# EAGLE board pdb (EAGLE 8.7.0)
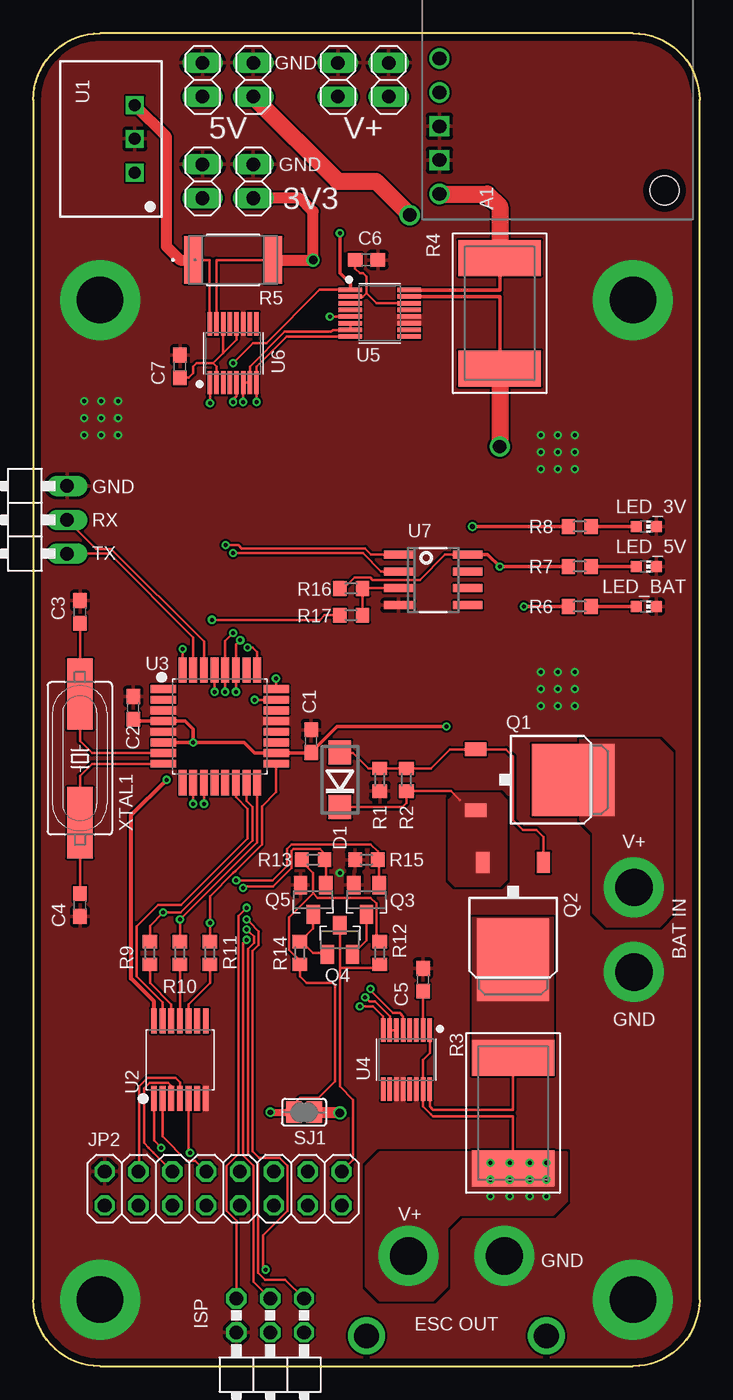
[diagram p0: board, top side]
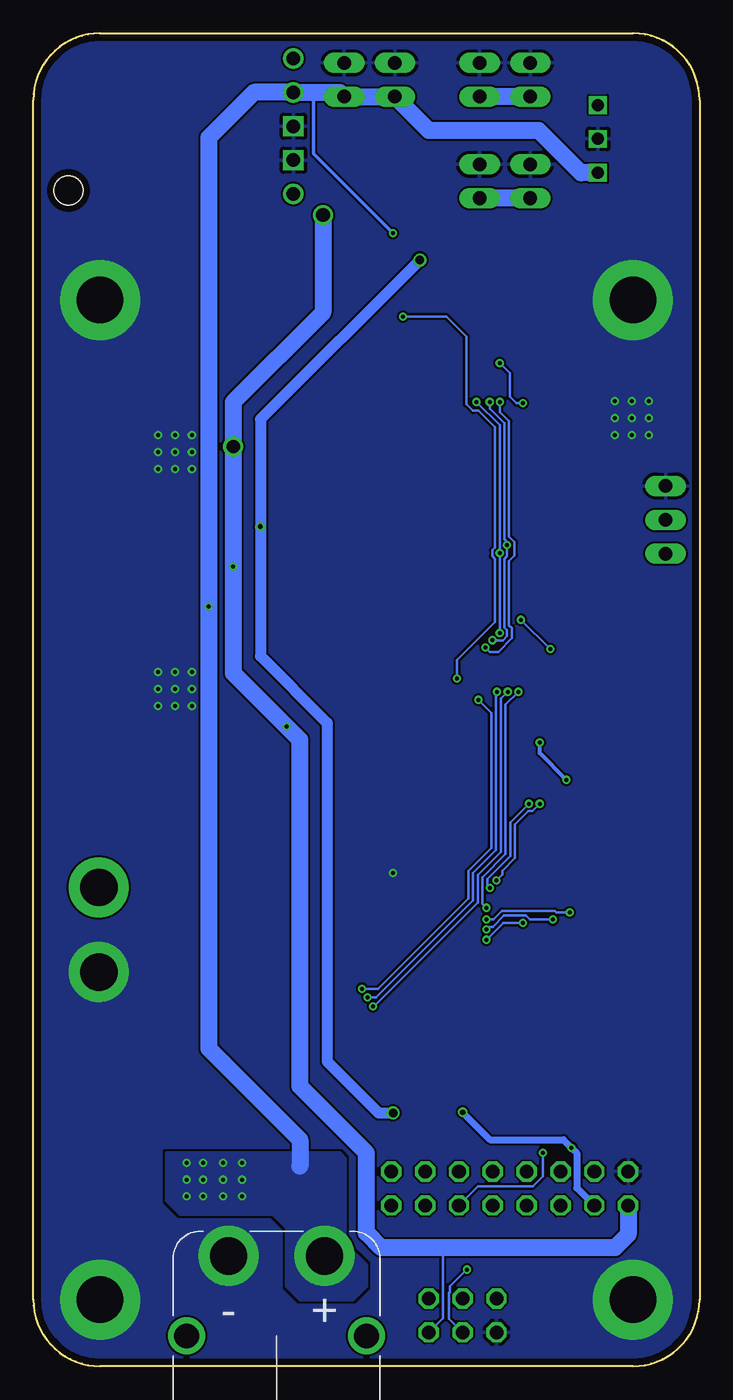
[diagram p1: board, bottom side, seen from below]

Size 50 x 100 mm. Coordinates in mm from the lower left corner, seen from the top.
Outline: 5,0 arc-90 0,5 0,95 arc-90 5,100 45,100 arc-90 50,95 50,5 arc-90 45,0 5,0
Copper layers (1*16): Top 0.035mm / dielectric 1.5mm / Bottom 0.035mm
Design rules "FusionPCB": minimum track width 7mil, minimum drill 0.3mm, track to track 6mil, track to pad 6mil, pad to pad 6mil, via to via 6mil, smd to smd 6mil, copper to edge 20mil, drill to drill 12mil, minimum pad ring 6mil, minimum via ring 6mil, stop-mask expansion 4mil, vias tented up to drill 0.9mm, thermal gap 10mil
Net classes: 1 V+: width 1.27 mm, clearance 0.216 mm; 2 GND: width 0.254 mm; 3 SIGNAL: width 0.203 mm; 4 POWER: width 0.305 mm

## Footprints (pad centres in the part's own frame; a part is rotated, then mirrored left to right if it is on the bottom)
D24V50F5_SINGLESCREW = drill 1.016: 1 -12.065,1.27; 2 -9.525,1.27; 5 -1.905,1.27 | drill 1.016 square: 3 -6.985,1.27; 4 -4.445,1.27 | hole 2.184: -2.159,18.161
C0603 = smd 1.1 x 1: 1 -0.85,0; 2 0.85,0
DO214BA = smd 1.8 x 1.7: A 2.05,0; C -2.05,0
2X03/90 = drill 1.016 octagon: 1 -2.54,-6.35; 2 -2.54,-3.81; 3 0,-6.35; 4 0,-3.81; 5 2.54,-6.35; 6 2.54,-3.81
XT60PWFEMALE = drill 1.85: NC1 -6.75,0; NC2 6.75,0 | drill 2.8 pad 4.5: NEG 3.6,-6; POS -3.6,-6
1X02 = drill 1.016 long: 1 -1.27,0; 2 1.27,0
2X08 = drill 1.016 octagon: 1 -8.89,-1.27; 2 -8.89,1.27; 3 -6.35,-1.27; 4 -6.35,1.27; 5 -3.81,-1.27; 6 -3.81,1.27; 7 -1.27,-1.27; 8 -1.27,1.27; 9 1.27,-1.27; 10 1.27,1.27; 11 3.81,-1.27; 12 3.81,1.27; 13 6.35,-1.27; 14 6.35,1.27; 15 8.89,-1.27; 16 8.89,1.27
1X03/90 = drill 1.016 long: 1 -2.54,-3.81; 2 0,-3.81; 3 2.54,-3.81
CHIP-LED0603 = smd 0.8 x 0.8: A 0,-0.75; C 0,0.75
D-PAK_TO252AA = smd 1 x 1.6: 1 -2.28,-4.8; 3 2.28,-4.8 | smd 5.4 x 6.2: 4 0,2.5
BSN20_215 = smd 1 x 1.4: 1 -0.95,-1.1; 2 0.95,-1.1; 3 0,1.1
R0603 = smd 1 x 1.1: 1 -0.85,0; 2 0.85,0
3920 = smd 2.7 x 6.2: P$1 -4.15,0; P$2 4.15,0
BO_CRA2512 = smd 1.397 x 3.531: 1 -2.985,0; 2 2.985,0
SJ = smd 1.168 x 1.6: 1 -0.762,0; 2 0.762,0
TSR-1 = drill 0.9 square: 1 -2.54,0; 2 0,0; 3 2.54,0
SOP65P640X120-14 = smd 1.872 x 0.447: 1 -2.922,1.95; 2 -2.922,1.3; 3 -2.922,0.65; 4 -2.922,0; 5 -2.922,-0.65; 6 -2.922,-1.3; 7 -2.922,-1.95; 8 2.922,-1.95; 9 2.922,-1.3; 10 2.922,-0.65; 11 2.922,0; 12 2.922,0.65; 13 2.922,1.3; 14 2.922,1.95
QFP80P900X900X120-32 = smd 1.9 x 0.587: 1 -4.231,2.8; 2 -4.231,2; 3 -4.231,1.2; 4 -4.231,0.4; 5 -4.231,-0.4; 6 -4.231,-1.2; 7 -4.231,-2; 8 -4.231,-2.8; 17 4.231,-2.8; 18 4.231,-2; 19 4.231,-1.2; 20 4.231,-0.4; 21 4.231,0.4; 22 4.231,1.2; 23 4.231,2; 24 4.231,2.8 | smd 0.587 x 1.9: 9 -2.8,-4.231; 10 -2,-4.231; 11 -1.2,-4.231; 12 -0.4,-4.231; 13 0.4,-4.231; 14 1.2,-4.231; 15 2,-4.231; 16 2.8,-4.231; 25 2.8,4.231; 26 2,4.231; 27 1.2,4.231; 28 0.4,4.231; 29 -0.4,4.231; 30 -1.2,4.231; 31 -2,4.231; 32 -2.8,4.231
SOP50P489X110-16 = smd 1.753 x 0.344: 1 -2.209,1.75; 2 -2.209,1.25; 3 -2.209,0.75; 4 -2.209,0.25; 5 -2.209,-0.25; 6 -2.209,-0.75; 7 -2.209,-1.25; 8 -2.209,-1.75; 9 2.209,-1.75; 10 2.209,-1.25; 11 2.209,-0.75; 12 2.209,-0.25; 13 2.209,0.25; 14 2.209,0.75; 15 2.209,1.25; 16 2.209,1.75
SO08 = smd 0.6 x 2.2: 1 -1.905,-2.6; 2 -0.635,-2.6; 3 0.635,-2.6; 4 1.905,-2.6; 5 1.905,2.6; 6 0.635,2.6; 7 -0.635,2.6; 8 -1.905,2.6
HC49UP = smd 5.334 x 1.93: 1 -4.826,0; 2 4.826,0

## Placement (x,y rotation side)
A1  D24V50F5SINGLESCREW  [D24V50F5_SINGLESCREW]  29.21,86.04 270 top
C1  100nF  [C0603]  20.85,46.9 90 top
C2  100nF  [C0603]  7.5,49.4 90 top
C3  22pF  [C0603]  3.5,56.6 90 top
C4  22pF  [C0603]  3.5,34.6 270 top
C5  0,1µF  [C0603]  29.25,29 90 top
C6  0,1µF  [C0603]  25,83 0 top
C7  0,1µF  [C0603]  11,75 90 top
D1  ZD18  [DO214BA]  23,44 90 top
ISP  [2X03/90]  17.78,-1.27 180 top
J1  XT60PWFEMALE  [XT60PWFEMALE]  31.75,2.27 180 bottom
JP1  [1X02]  26.67,96.52 90 top
JP2  [2X08]  14.24,13.34 0 top
JP3  [1X02]  22.86,96.52 90 top
JP4  [1X02]  16.51,96.52 90 top
JP5  [1X02]  12.7,96.52 90 top
JP6  [1X02]  12.7,88.9 90 top
JP7  [1X02]  16.51,88.9 90 top
JP8  [1X03/90]  -1.27,63.5 90 top
LED_3V  orange  [CHIP-LED0603]  46,63 270 top
LED_5V  grün  [CHIP-LED0603]  46,60 270 top
LED_BAT  blau  [CHIP-LED0603]  46,57 270 top
Q1  IRFR5305PBF  [D-PAK_TO252AA]  38,44 270 top
Q2  IRFR5305PBF  [D-PAK_TO252AA]  36,33 180 top
Q3  BSN20,215  [BSN20_215]  25,35 180 top
Q4  BSN20,215  [BSN20_215]  21,35 180 top
Q5  BSN20,215  [BSN20_215]  23,32 0 top
R1  1k  [R0603]  26,44 90 top
R2  10k  [R0603]  28,44 270 top
R3  2m  [3920]  36,19 270 top
R4  2m  [3920]  35,79 270 top
R5  CRA2512-FZ-R040ELF  [BO_CRA2512]  15,83 0 top
R6  1,2k  [R0603]  41,57 180 top
R7  250  [R0603]  41,60 180 top
R8  100  [R0603]  41,63 180 top
R9  10k  [R0603]  8.75,31 270 top
R10  10k  [R0603]  11,31 270 top
R11  10k  [R0603]  13.25,31 270 top
R12  10k  [R0603]  26,31 90 top
R13  10k  [R0603]  21,38 180 top
R14  10k  [R0603]  20,31 270 top
R15  10k  [R0603]  25,38 0 top
R16  10k  [R0603]  23.85,58.35 180 top
R17  10k  [R0603]  23.85,56.35 0 top
SJ1  [SJ]  20.32,19.05 180 top
U1  TSR_1-2433  [TSR-1]  7.62,92.08 90 top
U2  TXB0104  [SOP65P640X120-14]  11,23 90 top
U3  ATMEGA48-20AU  [QFP80P900X900X120-32]  14,48 0 top
U4  LTC2946CMSPBF  [SOP50P489X110-16]  28,23 270 top
U5  LTC2946CMSPBF  [SOP50P489X110-16]  26,79 0 top
U6  LTC2946CMSPBF  [SOP50P489X110-16]  15,76 90 top
U7  AT30TS74SS8M  [SO08]  30,59 270 top
XTAL1  20MHz  [HC49UP]  3.5,45.6 90 top

## Library data of the parts
A1 = jonas_pololu
C1-C7 = rcl; SPICEPREFIX: C
D1 = diode
ISP JP1-JP8 = pinhead
J1 = amass
LED_3V LED_5V LED_BAT = led
Q1 Q2 = transistor-power
Q3-Q5 = jonas_mosfet; AVAILABILITY: Good; DESCRIPTION: BSN Series 50 V 15 Ohm 0.83 W N-Channel Enhancement Mode Transistor - SOT-23; MF: NXP Semiconductors; MP: BSN20,215; PACKAGE: TO-236 NXP Semiconductors; PRICE: 0.17 USD
R1 R2 R6-R17 = rcl; SPICEPREFIX: R
R3 R4 = jonas_resistor
R5 = jonas_bourns; MANUFACTURER_PART_NUMBER: CRA2512FZR040ELF; VENDOR: Bourns Electronics
SJ1 = jumper
U1 = Robo-Lib
U2 = jonas_ti
U3 = jonas_atmel
U4 = linear; SPICEPREFIX: X
U5 U6 = linear
U7 = jonas_microchip
XTAL1 = crystal; OC_FARNELL: unknown; OC_NEWARK: unknown

## Nets
!ALERT_3V3 [SIGNAL]: U3.25 U6.5
!ALERT_5V [SIGNAL]: U3.24 U5.5
!ALERT_V+ [SIGNAL]: U3.23 U4.5
!TMP_ALERT: R17.1 U3.32
+3V3: JP6.1 JP7.1 R5.2 R8.2 SJ1.1 U6.15
+5V: C1.1 C2.1 ISP.2 JP2.1 JP4.1 JP5.1 R4.P$2 R7.2 R16.2 U2.14 U3.4 U3.6 U3.18 U5.15 U7.8
AKKU-ZWISCHEN: D1.C Q1.3 Q2.3 R2.2
BAT_IN: Q1.4
EXT_3V3: JP2.3 R12.2 R13.2 R14.2 SJ1.2 U2.1
EXT_!RST [SIGNAL]: JP2.16 Q5.3 R12.1
EXT_A0 [SIGNAL]: JP2.9
EXT_A3 [SIGNAL]: JP2.7
EXT_A4 [SIGNAL]: JP2.5
EXT_D1 [SIGNAL]: JP2.14
EXT_D2 [SIGNAL]: JP2.12
EXT_D9 [SIGNAL]: JP2.10
EXT_SCL_5V [SIGNAL]: JP2.13
EXT_SDA_5V [SIGNAL]: JP2.15
EXT_SPI_CLK [SIGNAL]: JP2.11 U2.5
EXT_SPI_CS [SIGNAL]: JP2.8 U2.2
EXT_SPI_MISO [SIGNAL]: JP2.4 U2.4
EXT_SPI_MOSI [SIGNAL]: JP2.6 U2.3
GND: A1.3 A1.4 C1.2 C2.2 C3.2 C4.2 C5.2 C6.2 C7.2 ISP.6 J1.NEG JP1.2 JP2.2 JP3.2 JP4.2 JP5.2 JP6.2 JP7.2 JP8.3 LED_3V.C LED_5V.C LED_BAT.C Q3.2 Q4.2 R1.1 R15.1 U1.2 U2.7 U3.3 U3.5 U3.21 U4.11 U4.12 U4.14 U5.11 U5.12 U6.11 U7.4
GPIO1_3V3 [SIGNAL]: U6.3
GPIO1_5V [SIGNAL]: U5.3
GPIO1_V+ [SIGNAL]: U4.3
GPIO2_3V3 [SIGNAL]: U6.4
GPIO2_5V [SIGNAL]: U5.4
GPIO2_V+ [SIGNAL]: U4.4
INTVCC_3V3: C7.1 U6.2 U6.12 U6.14
INTVCC_5V: C6.1 U5.2 U5.14
INTVCC_V+: C5.1 U4.2
MISO_5V [SIGNAL]: ISP.1 R10.1 U3.16
MOSI_5V [SIGNAL]: ISP.4 R9.1 U3.15
N$1: R10.2 U2.11
N$2: R9.2 U2.12
N$3: R11.2 U2.10
N$4: LED_BAT.A R6.1
N$5: LED_5V.A R7.1
N$6: R16.1 R17.2 U7.3
N$7: LED_3V.A R8.1
N$9: Q4.3 Q5.1 R14.1
N$11: Q3.3 Q5.2
N$27: C3.1 U3.7 XTAL1.2
N$28: C4.1 U3.8 XTAL1.1
N$41: D1.A Q1.1 Q2.1 R1.2 R2.1
RESET: ISP.5 U3.29
RST_H: Q3.1 R15.2 U3.10
RST_L: Q4.1 R13.1 U3.11
RX: JP8.2 U3.30
SCK_5V [SIGNAL]: ISP.3 R11.1 U3.17
SCL [SIGNAL]: U3.28 U4.8 U5.8 U6.8 U7.2
SDA [SIGNAL]: U3.27 U4.6 U4.7 U5.6 U5.7 U6.6 U6.7 U7.1
SENSE+3V3 [SIGNAL]: R5.1 U1.3 U6.16
SENSE+5V [SIGNAL]: A1.5 R4.P$1 U5.16
SENSE+V+: Q2.4 R3.P$1 U4.16
SS_5V [SIGNAL]: U2.13 U3.14
TX: JP8.1 U3.31
V+: A1.2 J1.POS JP1.1 JP3.1 R3.P$2 R6.2 U1.1 U4.1 U4.15 U5.1 U6.1

## Tracks (layer width: path | path; a pad name or v marks a point on that pad's centre or on a via)
!ALERT_3V3  (via drill 0.3)
  Top 0.203: 15.25,73.81 U6.5 15.25,72.8 14.99,72.54 v14.99,72.35 | v16.07,53.93 16.47,53.93 16.8,53.6 U3.25
  Bottom 0.203: v16.07,53.93 15.74,53.6 15.11,53.6 14.09,54.62 14.09,55.38 14.29,55.58 14.29,60.42 13.89,60.82 13.89,61.83 14.29,62.23 14.29,70.89 14.99,71.6 v14.99,72.35
!ALERT_5V  (via drill 0.3)
  Top 0.203: v22.25,78.75 U5.5 23.82,78.75 | v18.2,51.6 18.2,50.83 U3.24
  Bottom 0.203: v22.25,78.75 19,78.75 17.5,77.25 17.5,72.18 17,71.68 16.58,71.68 15.36,70.45 15.36,70 15.36,69.65 15.36,61.43 15.56,61.23 15.56,60.77 15.36,60.57 15.36,55.84 18.2,53 v18.2,51.6
!ALERT_V+  (via drill 0.3)
  Top 0.203: v25.32,28.32 25.32,28.18 27.01,26.5 27.5,26.5 27.75,26.25 U4.5 | v16.6,50 U3.23
  Bottom 0.203: v25.32,28.32 24.11,28.32 17.36,35.08 17.36,37.15 15.62,38.88 15.62,49.02 v16.6,50
!TMP_ALERT  (via drill 0.3)
  Top 0.203: U3.32 v11.2,53.8 | v13.4,56 21.5,56 21.85,56.35 R17.1
  Bottom 0.203: v11.2,53.8 v13.4,56
+3V3  (via drill 0.35, 0.65)
  Top 0.203: U6.15 13.75,83 R5.2
  Top 0.254: R8.2 v32.96,63 v32.95,62.99
  Top 0.813: R5.2 v21,83 21,86.63 20,87.63 JP7.1 | v23,19 21.13,19 SJ1.1
  Bottom 0.813: v21,83 32.95,71.05 v32.95,62.99 32.95,53.27 27.94,48.26 27.94,22.86 24.08,19 v23,19
  Bottom 1.27: JP6.1 JP7.1
+5V  (via drill 0.3, 1, 1.02)
  Top 0.203: R16.2 23.29,58.35 24.09,59.15 25.3,59.15 25.46,59 29,59 30.91,60.91 U7.8
  Top 0.254: U7.8 34.09,60.91 v35,60 38.1,60 R7.2 | U5.15 35,80.25 R4.P$2 | U3.6 v12,46.8 | v12,46.8 15.8,46.8 16.6,46 U3.18 20.8,46 C1.1 22.8,48 v31,48 | v12,46.8 12,47.8 11.4,48.4 U3.4 7.65,48.4 C2.1
  Top 0.305: U2.14 9.05,27.37 7.34,29.08 7.34,41.34 v10,44
  Top 1.27: R4.P$2 v35,69 | JP4.1 22.86,88.9 25.72,88.9 v28.26,86.36
  Bottom 0.203: ISP.2 19.25,3.61 19.25,8.89
  Bottom 0.305: v10,44 12,46 v12,46.8
  Bottom 1.27: JP2.1 5.36,9.88 6.35,8.89 19.25,8.89 23.89,8.89 25,10 25,16 30,21 30,47 v31,48 35,52 v35,60 v35,69 35,72.31 28.26,79.06 v28.26,86.36 | JP5.1 JP4.1
AKKU-ZWISCHEN
  Top 0.203: 32,42.5 31.35,43.15 R2.2 28,42.25 27.7,41.95 D1.C
  pour Top (no thermals): 35,43 35.5,42.5 35.5,36.5 35,36 31.68,36 31.18,36.5 31.18,42.5 31.68,43
BAT_IN  (via drill 2.8 pad 4.5)
  other vias: 45.09,35.92
  pour Top (no thermals): 41,47 41,41 42,40 42,34 43,33 47,33 48,34 48,46 47,47
EXT_3V3  (via drill 0.3, 0.4)
  Top 0.203: U2.1 9.05,16.95 v9.6,16.4 | R13.2 20.15,37.85 21,37 21,35.46 | 21,35.46 19.2,33.66 19.2,31.25 20,30.44 R14.2 20,29.25 20.5,28.75 22.5,28.75 22.64,28.61 22.64,21.38 21.39,20.12 20,20.12 19.56,19.68 SJ1.2 | 21,35.46 21.03,35.46 21.34,35.15 25.31,35.15 25.75,34.7 25.75,32.1 R12.2
  Top 0.508: v17.78,19.05 SJ1.2
  Bottom 0.508: JP2.3 9.21,13.38 9.21,16 v9.6,16.4 10.21,17 15.73,17 v17.78,19.05
EXT_!RST
  Top 0.203: 25.7,29.84 R12.1 25.73,29.88 23,29.88 | JP2.16 24,15.47 24,20 23,21 23,29.88 | Q5.3 23,29.88
EXT_SPI_CLK  (via drill 0.3)
  Top 0.203: U2.5 11.65,16.1 v11.75,16
  Bottom 0.203: JP2.11 16.62,13.5 12.5,13.5 11.75,14.25 v11.75,16
EXT_SPI_CS
  Top 0.203: JP2.8 12.16,15.42 11.51,15.42 9.7,17.23 U2.2
EXT_SPI_MISO
  Top 0.203: JP2.4 7.94,14.65 7.94,20.99 8.57,21.62 10.68,21.62 11,21.3 U2.4
EXT_SPI_MOSI
  Top 0.203: 10.35,14.69 JP2.6 9.02,16.02 8.64,16.4 8.3,16.74 8.3,20.85 8.72,21.27 10.13,21.27 10.35,21.05 U2.3
GND  (via drill 0.3, 2.8 pad 4.5, 3.5 pad 6)
  other vias: 5,80 45,80 5,5 45,5 45.09,29.57 6.35,72.39 5.08,72.39 3.81,72.39 6.35,71.12 5.08,71.12 3.81,71.12 6.35,69.85 5.08,69.85 3.81,69.85 39.37,68.58 39.37,69.85 39.37,67.31 38.1,68.58 40.64,68.58 38.1,67.31 40.64,67.31 38.1,69.85 40.64,69.85 38.1,52.07 40.64,50.8 40.64,52.07 39.37,52.07 39.37,50.8 38.1,50.8 38.1,49.53 39.37,49.53 40.64,49.53 23,37
  pour Top (rank 6): 0,100 50.8,100 50.8,-2.54 0,-2.54
  pour Bottom (rank 6): 0,100 50.8,100 50.8,-2.54 0,-2.54
INTVCC_3V3
  Top 0.203: C7.1 11.65,74.15 12,74.5 12,75 12.25,75.25 13.5,75.25 | 15.25,77 14.25,76 | 14.25,76 13.5,75.25 | U6.12 15.25,77 | 15.25,77 | U6.14 14.25,76 | U6.2 13.75,75 13.5,75.25
INTVCC_5V
  Top 0.203: 25,80.5 25,81.75 24.75,82 24.5,82 24.15,82.35 C6.1 | 25,80.5 25.75,79.75 U5.14 | 25,80.5 24.75,80.25 U5.2
INTVCC_V+
  Top 0.203: U4.2 29.25,25.18 C5.1
MISO_5V  (via drill 0.3)
  Top 0.203: ISP.1 18.9,6.5 17.39,6.5 16.89,7 16.89,15.17 16.11,15.95 16.11,31.32 16.56,31.77 16.56,32.23 16.23,32.56 16.2,32.56 v16,32.76 | R10.1 v11,33.5 16.8,39.3 U3.16
  Bottom 0.203: v16,32.76 15.8,32.96 15.52,32.96 14.67,33.81 13.02,33.81 12.72,33.5 v11,33.5
MOSI_5V  (via drill 0.3)
  Top 0.203: v17.44,7.25 17.24,7.45 17.24,9.81 19.07,11.64 19.07,15.03 18.48,15.62 16.94,15.62 16.46,16.1 16.46,31.17 16.91,31.62 16.91,32.63 16.23,33.31 16.2,33.31 v16,33.51 | R9.1 8.75,33.05 v9.75,34.05 10.76,34.05 10.77,34.06 11.05,34.06 16.44,39.45 16.44,41.96 16,42.4 U3.15
  Bottom 0.203: ISP.4 18.8,3.56 18.8,5.5 18.75,5.55 18.75,6 17.5,7.25 v17.44,7.25 | v16,33.51 15.46,33.51 14.81,34.16 10.87,34.16 10.76,34.05 v9.75,34.05
N$1
  Top 0.203: U2.11 R10.2
N$2
  Top 0.203: R9.2 8.75,28.75 10.35,27.15 U2.12
N$3
  Top 0.203: R11.2 13.25,28.75 11.65,27.15 U2.10
N$4
  Top 0.254: R6.1 LED_BAT.A
N$5
  Top 0.254: R7.1 LED_5V.A
N$6
  Top 0.203: R17.2 R16.1 24.71,58.37 U7.3
N$7
  Top 0.254: R8.1 LED_3V.A
N$9
  Top 0.203: Q4.3 21,32.85 20.07,31.93 | 20.07,31.93 R14.1 | Q5.1 21.95,31 21,31 20.07,31.93
N$11
  Top 0.203: Q5.2 25,31.95 Q3.3
N$27
  Top 0.203: U3.7 4.4,46 3.5,46.9 3.5,50 XTAL1.2 C3.1
N$28
  Top 0.203: U3.8 4.4,45.2 3.5,44.3 XTAL1.1 C4.1
N$41
  Top 0.203: Q2.1 38.28,39.72 37.75,40.25 36.75,40.25 36,41 36,45.75 35.47,46.28 Q1.1 31.28,46.28 29.85,44.85 R2.1 R1.2 25.15,44.85 24,46 23.05,46 D1.A
RESET  (via drill 0.3)
  Top 0.203: ISP.5 15.24,10.9 14.5,11.64 14.5,15.03 15.39,15.92 15.39,33.79 v16,34.4 | U3.29 v13.6,50.6
  Bottom 0.203: v13.6,50.6 14.56,49.64 14.56,38.42 16.29,36.69 16.29,34.69 v16,34.4
RST_H  (via drill 0.3)
  Top 0.203: Q3.1 25.95,37.9 R15.2 25.85,38.6 25.29,39.16 19.4,39.16 19.04,38.8 19.04,37.54 17.95,36.45 v15.24,36.45 | v12,42.2 U3.10
  Bottom 0.203: v15.24,36.45 14.8,36.88 14.8,37.17 13.85,38.12 13.85,40.65 12.85,41.64 12.56,41.64 v12,42.2
RST_L  (via drill 0.3)
  Top 0.203: Q4.1 21.95,37.9 R13.1 21.85,38.48 21.52,38.8 19.55,38.8 19.4,38.66 19.4,37.4 18,36 15.86,36 v15.73,35.88 | v12.8,42.2 U3.11
  Bottom 0.203: v12.8,42.2 14.2,40.8 14.2,38.27 15.93,36.54 15.93,36.08 v15.73,35.88
RX
  Top 0.203: JP8.2 4.72,61.32 5.86,61.32 12.8,54.38 U3.30
SCK_5V  (via drill 0.3)
  Top 0.203: ISP.3 16.53,6.33 16.53,15.03 15.75,15.81 15.75,31.75 v16,32 | R11.1 v13.25,33.25 13.25,35.25 15,37 15.18,37.17 17.16,39.16 17.16,42 18.23,43.08 U3.17
  Bottom 0.203: v16,32 15.8,32.2 15.77,32.2 14.72,33.25 v13.25,33.25
SCL  (via drill 0.3)
  Top 0.203: U7.2 26.11,59.63 24.75,61 v15,61 | v24.5,27 25.5,27 26.25,26.25 U4.8 | U5.8 19,77.25 16.75,75 U6.8 v16.75,72.35 | v14.4,50.6 U3.28 14.4,54.4 v15,55
  Bottom 0.203: v24.5,27 24.43,27 16.64,34.78 16.64,36.85 14.91,38.58 14.91,50.09 v14.4,50.6 | v15,55 v15,61 15,70.6 v16.75,72.35
SDA  (via drill 0.3)
  Top 0.203: U4.6 U4.7 26.75,26.25 25.65,27.36 25.21,27.36 v24.91,27.66 | U5.6 U5.7 22.5,77.75 22.36,77.61 18.85,77.61 16.25,75 U6.7 U6.6 v15.75,72.35 | v15.2,50.6 U3.27 15.2,54.13 v15.54,54.47 | v14.44,61.6 15.4,61.6 15.64,61.36 24.89,61.36 25.34,60.91 U7.1
  Bottom 0.203: v24.91,27.66 24.27,27.66 17,34.93 17,37 15.27,38.73 15.27,50.53 v15.2,50.6 | v15.54,54.47 15.25,54.47 15.23,54.44 14.77,54.44 14.44,54.77 14.44,55.23 14.64,55.43 14.64,60.57 14.44,60.77 v14.44,61.6 14.44,61.84 14.64,62.04 14.64,70.75 15.75,71.85 v15.75,72.35
SENSE+3V3
  Top 0.203: U6.16 13.25,83 R5.1
  Top 0.813: R5.1 11,83 10,84 10,92.23 U1.3
SENSE+5V
  Top 0.254: U5.16 35,80.75 R4.P$1
  Top 1.27: A1.5 34.05,87.95 35,87 R4.P$1
SENSE+V+
  Top 0.203: R3.P$1 36,19.25 30,19.25 29.75,19.5 | 29.75,19.5 | U4.16 29.75,19.5
  pour Top (no thermals): 33,22 33,33.63 39,33.63 39,22
SS_5V
  Top 0.203: U2.13 9.7,27.3 7.75,29.25 7.75,33 9.35,34.61 11.1,34.61 16.09,39.6 16.09,41.81 15.2,42.7 U3.14
TX
  Top 0.203: U3.31 12,54.67 5.71,60.96 JP8.1
V+  (via drill 0.3)
  Top 0.203: v13.25,72.25 U6.1 13.25,73.81 | R3.P$2 36,18.75 30,18.75 | 30,18.75 | 30,18.75 29.86,18.89 29.85,18.89 29.25,19.5 U4.15 29.25,23 29.75,23.5 U4.1 | v15,75.25 16.5,76.75 17.49,76.75 21.5,80.75 U5.1
  Top 0.254: v23,85 23,82 23.79,81.21 U5.1 | R6.2 v36.83,57
  Bottom 0.203: v15,75.25 14.25,74.5 14.25,72.75 13.75,72.25 v13.25,72.25
  Bottom 0.254: v23,85 28.96,90.96 28.96,95.31 29.21,95.57 | 30.42,95.57 A1.2
  Bottom 1.27: 30,15 30,17 36.83,23.83 v36.83,57 36.83,92.17 33.43,95.57 A1.2 29.21,95.57 26.99,95.57 JP1.1 JP3.1 20.32,92.71 12.06,92.71 8.89,89.53 U1.1
  other vias: 34.32,15.25 35.75,15.25 37.25,15.25 38.5,15.25 38.5,14 37.25,14 35.75,14 34.32,14 34.32,12.75 35.75,12.75 37.25,12.75 38.5,12.75
  pour Top (no thermals): 26,5 30,5 31,6 31,10.4 32,11.4 39,11.4 40,12.4 40,16 26,16 25,15 25,6
  pour Bottom (no thermals): 26,5 30,5 31,6 31,10.4 32,11.4 39,11.4 40,12.4 40,16 27,16 26.6,15.6 26.6,9.2 25,7.6 25,6

## Text on the board
tPlace: GND | 5V | V+ | GND | 3V3 | GND | RX | TX | V+ | BAT IN | GND | V+ | GND | ESC OUT